# Altium PCB CameraBoard.PcbDoc (part 1 of 2)
Units mm, origin at the board's own origin, x right, y up, seen from the top; angles counter-clockwise.
Board outline 100 x 85.93 mm, 4 copper layers (Top Layer, GND Layer, PWR Layer, Bottom Layer), stack 1.586 mm thick; 79 components, 56 nets, 412 pads, 150 vias.
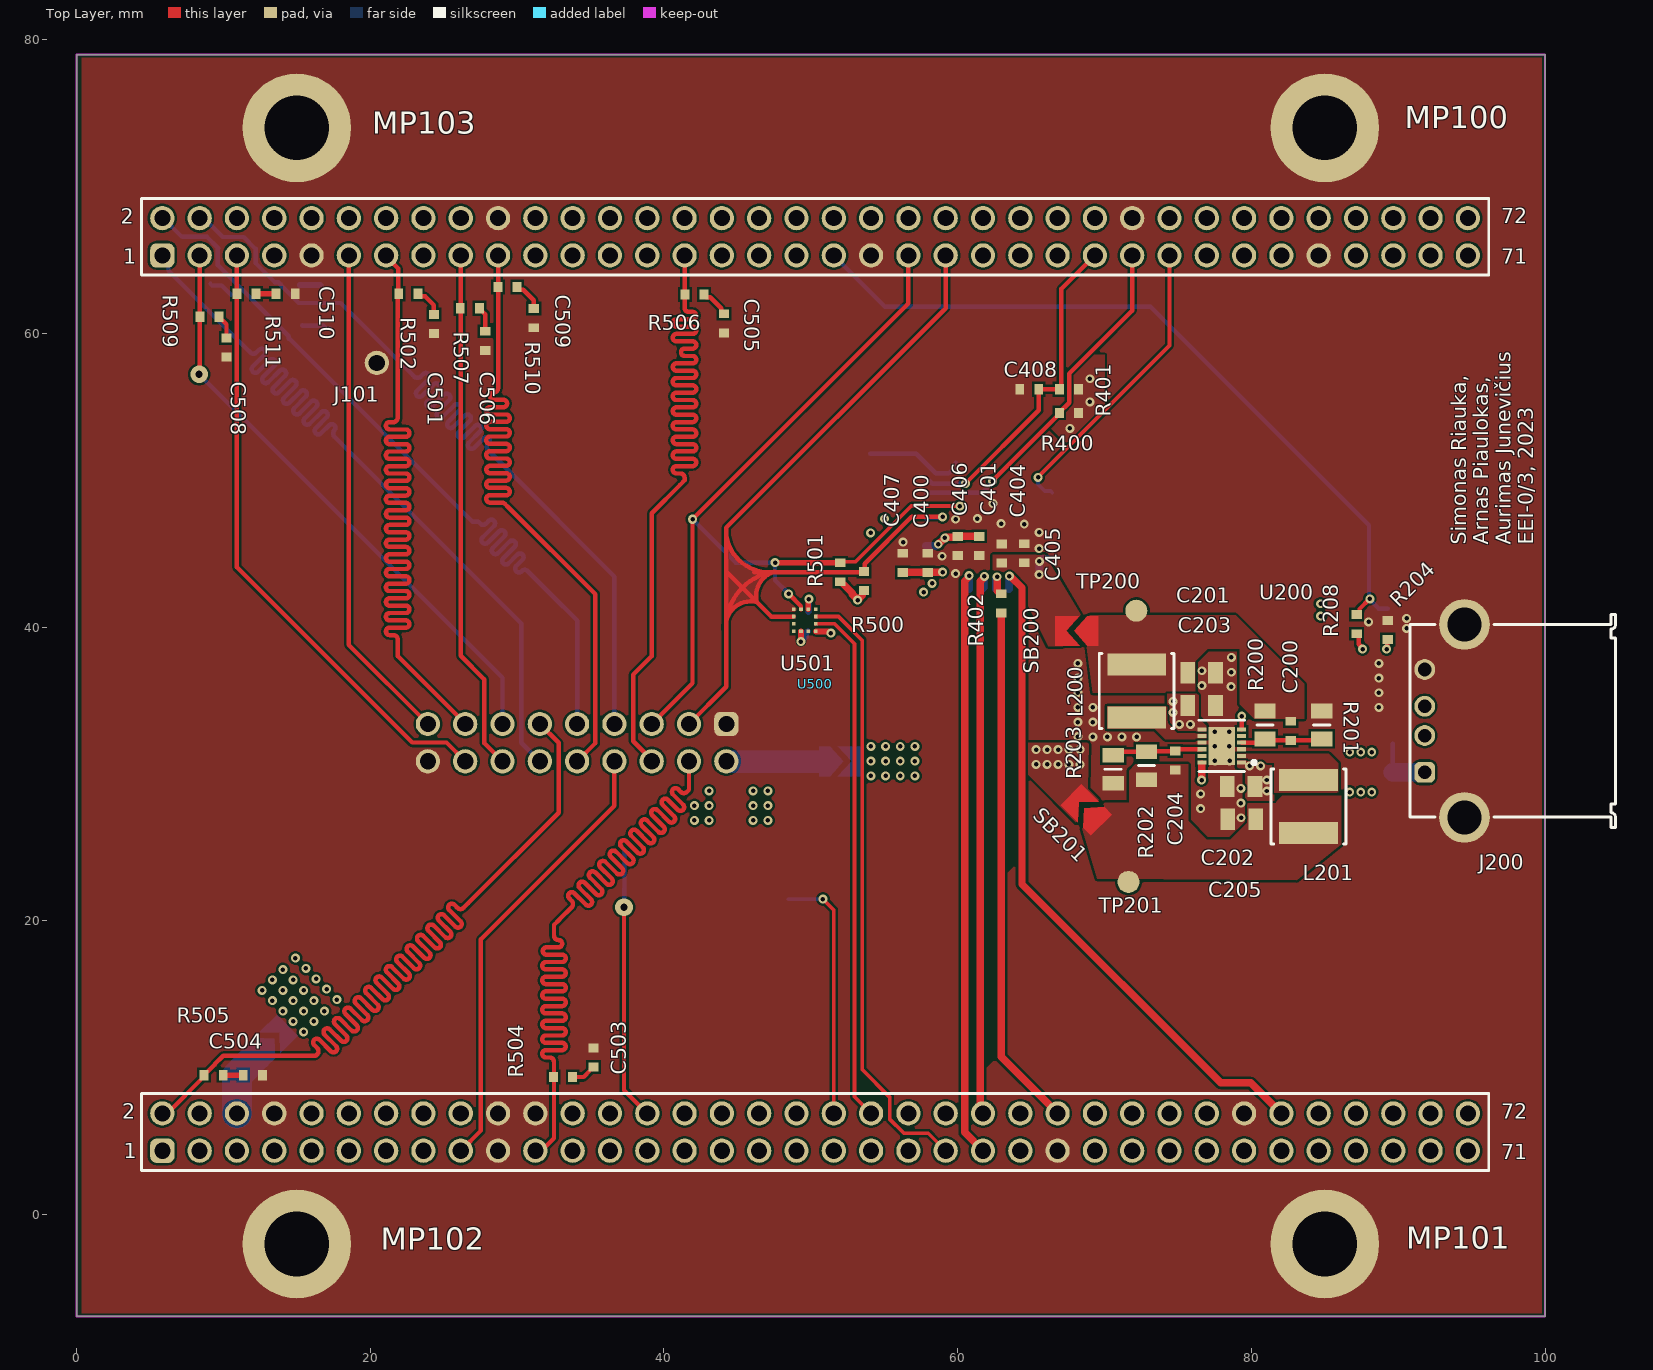
[diagram p0: Top Layer view]
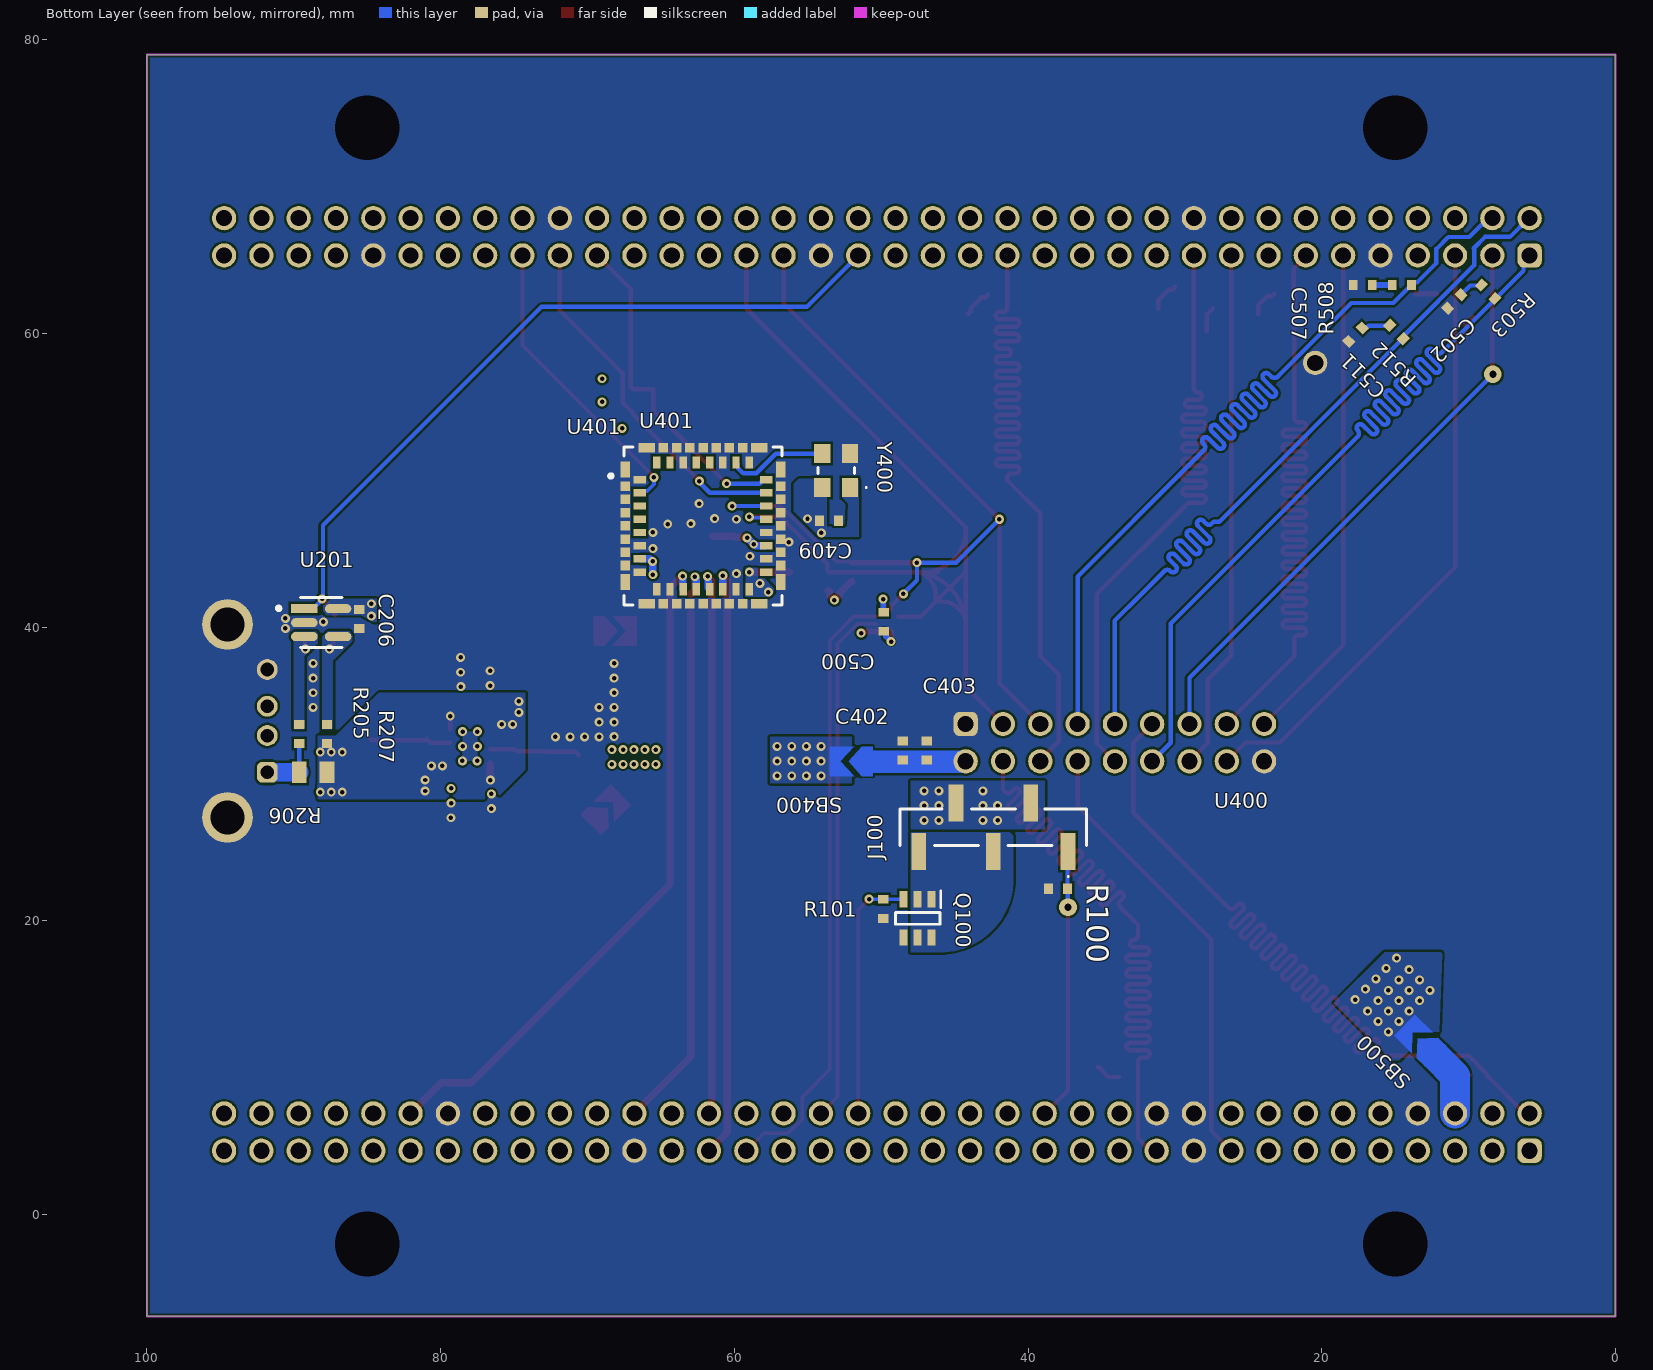
[diagram p1: Bottom Layer view, seen from below]
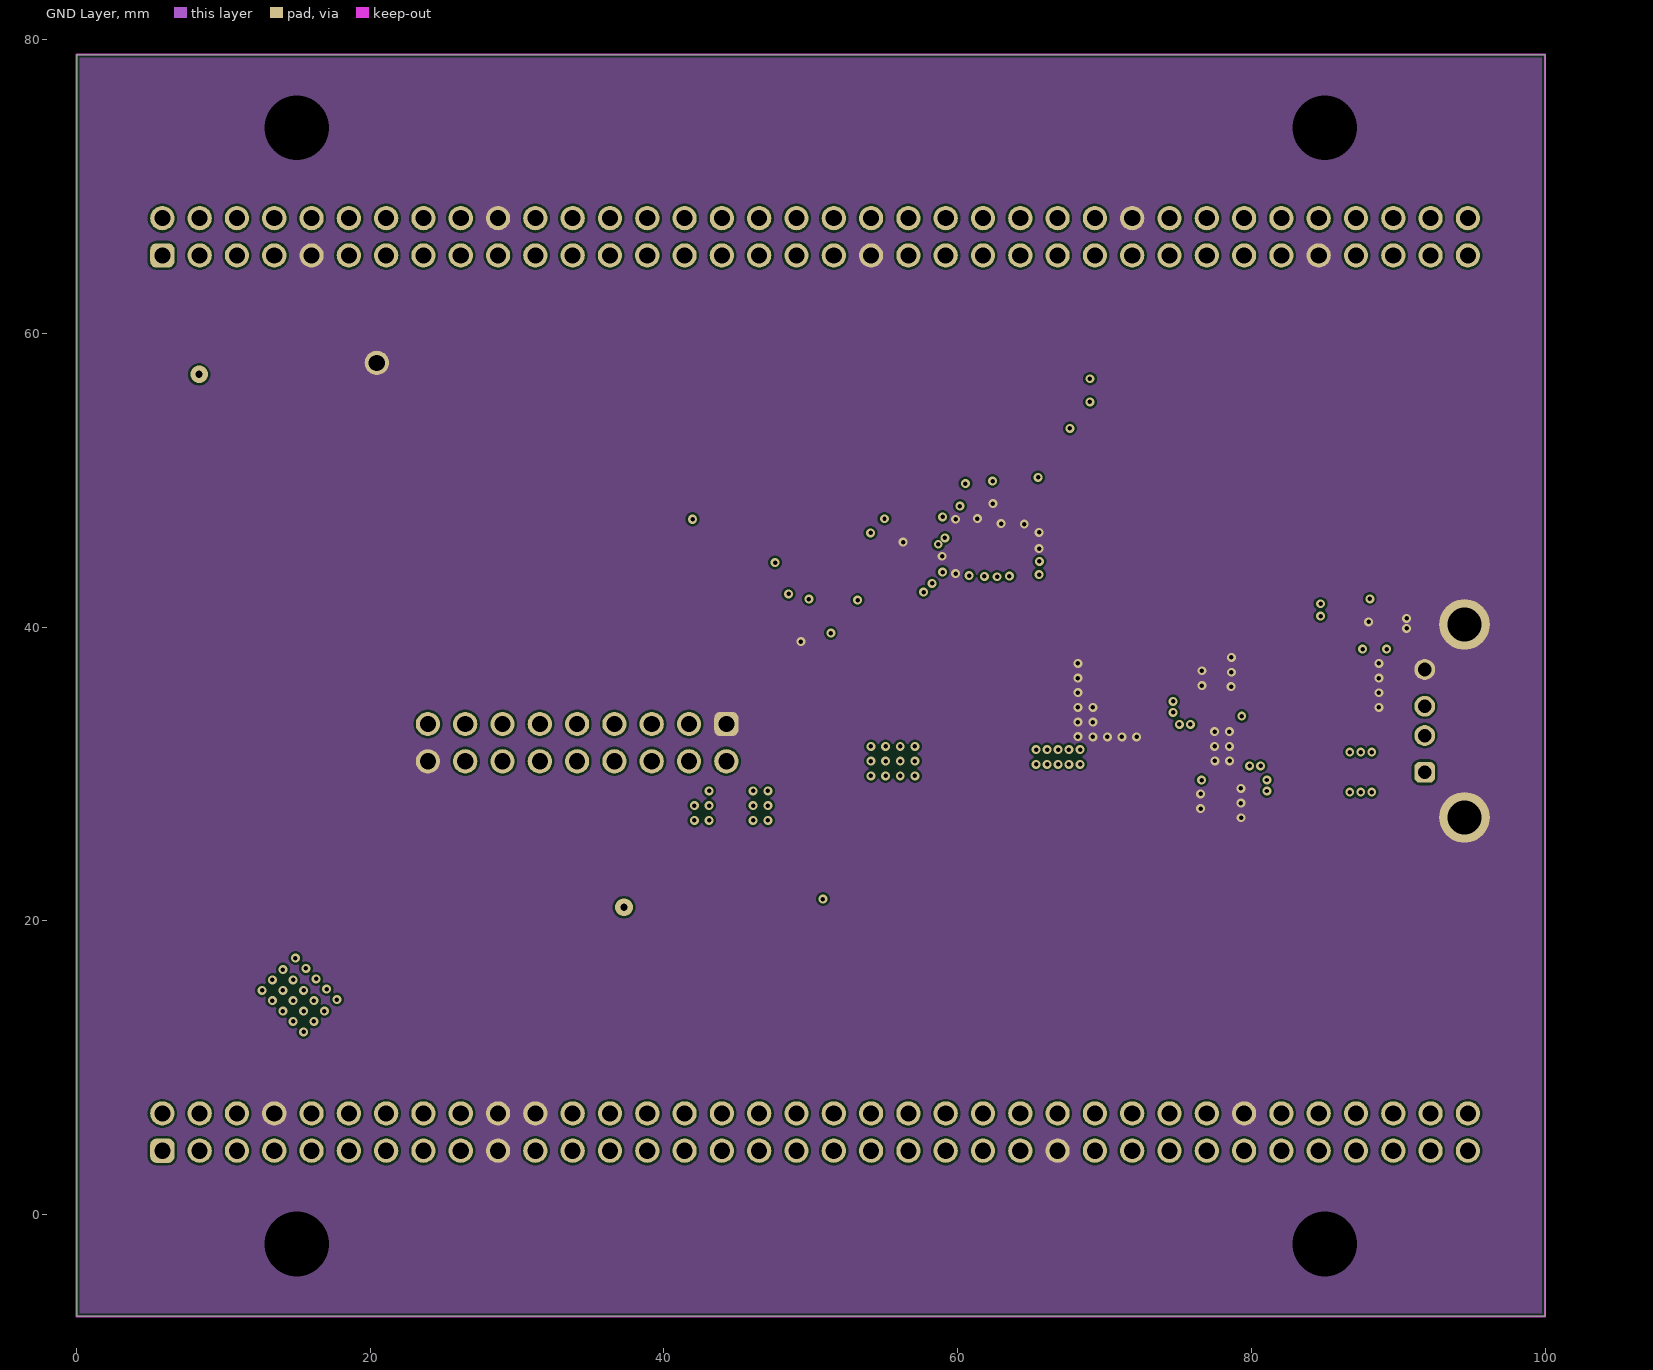
[diagram p2: GND Layer]
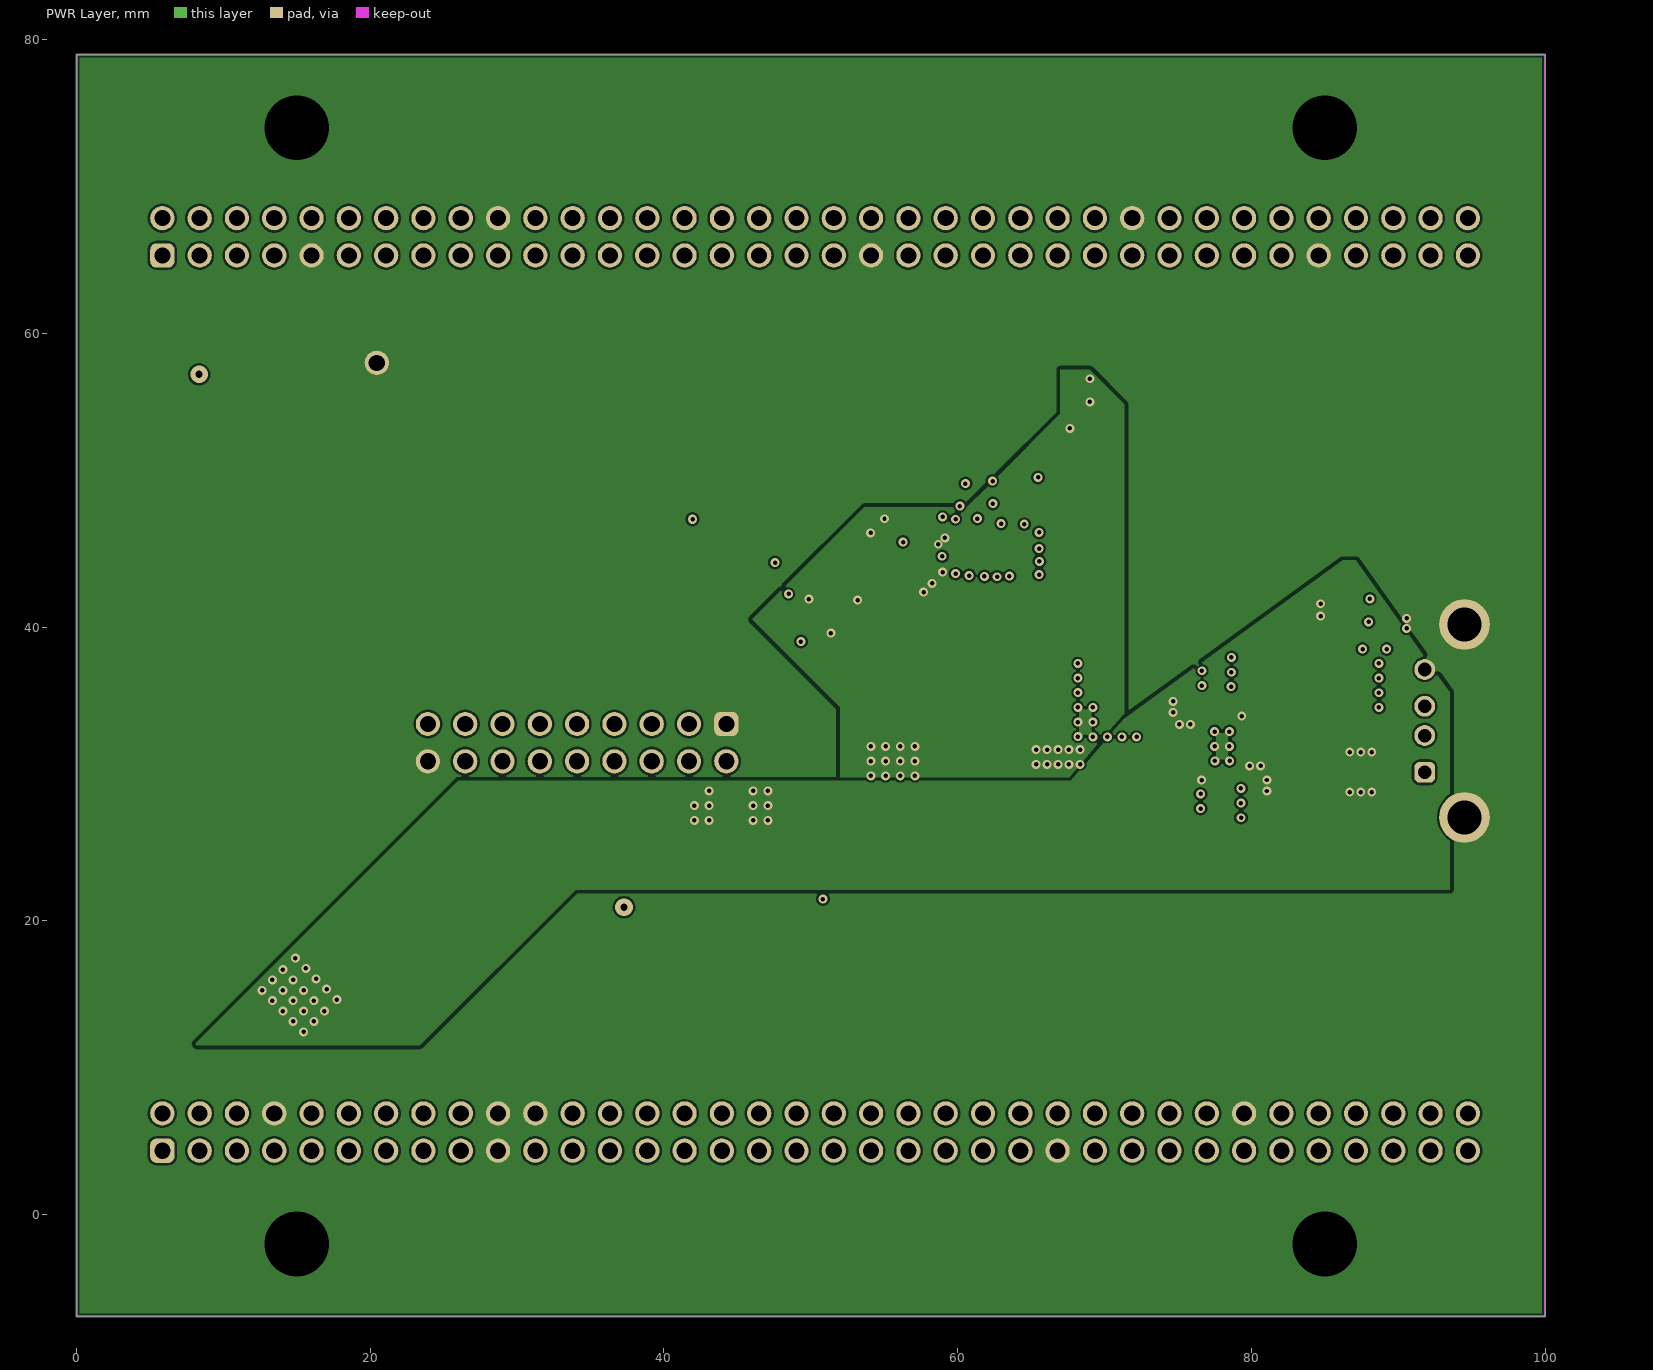
[diagram p3: PWR Layer]

## Layer stack, top to bottom
Top Solder: solder mask 0.0127, Solder Resist, Dk 3.3
Top Layer: signal copper 0.035
Dielectric 1: prepreg 0.2104, PP-006, Dk 4.4
GND Layer: signal copper 0.0152
Dielectric1: core 1.065, FR-4, Dk 4.4
PWR Layer: signal copper 0.0152
Dielectric 2: prepreg 0.2104, PP-006, Dk 4.4
Bottom Layer: signal copper 0.035
Bottom Solder: solder mask 0.0127, Solder Resist, Dk 3.3

## Board outline
0,-6.934 100,-6.934 100,78.994 0,78.994

## Design rules (kind name [scope] priority, off if disabled: settings)
Clearance [OnLayer('PWR Layer') vs OnLayer('PWR Layer')] p1: gap=0.254 ignorepadtopadclearanceinfootprint=FALSE
Clearance Clearance_2 [All] p2: gap=0.152 ignorepadtopadclearanceinfootprint=FALSE
DiffPairsRouting [All] p1: maxlimit=0.254 minlimit=0.254 mostfreqgap=0.254 toplayer_minwidth=0.254 toplayer_maxwidth=0.254 toplayer_prefwidth=0.254 midlayer1_minwidth=0.254 midlayer1_maxwidth=0.254 midlayer1_prefwidth=0.254 midlayer2_minwidth=0.254 midlayer2_maxwidth=0.254 midlayer2_prefwidth=0.254 bottomlayer_minwidth=0.254 bottomlayer_maxwidth=0.254 bottomlayer_prefwidth=0.254 maxuncoupledlength=12.7
HoleSize [All] p1: absolutevalues=TRUE maxlimit=10 minlimit=0.3 maxpercent=80.000 minpercent=20.000
HoleToHoleClearance [All] p1: gap=0.254 allowstackedmicrovias=FALSE
MinimumAnnularRing [All] p1: minimumring=0.152
MinimumSolderMaskSliver [All] p1: minsoldermaskwidth=0.152
PasteMaskExpansion [All] p1: expansion=0.254
PlaneClearance [All] p1: clearance=0.381
PlaneConnect [All] p1: pad.planeconnectstyle=Relief pad.reliefexpansion=0.508 pad.reliefentries=4 pad.reliefconductorwidth=0.254 pad.reliefairgap=0.254 via.planeconnectstyle=Direct via.reliefexpansion=0.508 via.reliefentries=4 via.reliefconductorwidth=0.254 via.reliefairgap=0.254
PolygonConnect [All] p1: connectstyle=Direct reliefconductorwidth=0.254 reliefentries=4 polygonreliefangle="90 Angle" airgapwidth=0.254
RoutingVias [All] p1: holewidth=0.3 width=0.604 viastyle="Through Hole" minholewidth=0.3 minwidth=0.604 maxholewidth=100 maxwidth=1.27
SMDNeckDown [All] p1 off: percent=100.000
SilkToSolderMaskClearance SilkscreenOverComponentPads [IsPad] p1: minsilkscreentomaskgap=0.15 clearancetoexposedcopper=TRUE
SolderMaskExpansion [All] p1: expansion=0.254 istentingtop=FALSE
Width Width_1 [All] p1: maxlimit=10 minlimit=0.254 preferedwidth=0.254
22 further rules are at their usual default settings.

## Classes and differential pairs
component class U_Connectors: J100 J101 MP100 MP101 MP102 MP103 Q100 R100 R101
component class U_Power: C1 C2 C3 C4 C5 C6 C7 C8 C9 C200 C201 C202 C203 C204 C205 C206 J200 L1 L200 L201 R1 R3 R4 R5 R6 R200 R201 R202 R203 R204 R205 R206 R207 R208 SB200 SB201 TP200 TP201 U1 U200 U201
component class U_Computation: C500 C501 C502 C503 C504 C505 C506 C507 C508 C509 C510 C511 R500 R501 R502 R503 R504 R505 R506 R507 R508 R509 R510 R511 R512 SB500 U500 U501
component class U_Cameras: C400 C401 C402 C403 C404 C405 C406 C407 C408 C409 R400 R401 R402 SB400 U400 U401 Y400

## Components (designator, comment, footprint, x,y, rotation, side; value= is the part's Value field where it differs from the comment)
C200 "100pF" 0402_footprint 82.683,32.29 r90 top
C201 "10uF" 0805_FOOTPRINT 76.606,36.906 r180 top
C202 "10uF" 0805_FOOTPRINT 79.299,29.159 r0 top
C203 "10uF" 0805_FOOTPRINT 76.606,34.671 r180 top
C204 "100pF" 0402_footprint 74.817,31.574 r270 top
C205 "10uF" 0805_FOOTPRINT 79.34,26.924 r0 top
C206 "0.1uF" 0402_footprint 85.547,41.213 r270 bottom
C400 "50nF" 0402_FOOTPRINT 57.964,43.733 r90 top
C401 "50nF" 0402_footprint 61.474,46.186 r270 top
C402 "1uF" 0402_footprint 48.534,32.254 r270 bottom
C403 "1uF" 0402_footprint 46.906,32.254 r270 bottom
C404 "50nF" 0402_footprint 63.01,45.663 r270 top
C405 "50nF" 0402_FOOTPRINT 64.531,45.688 r270 top
C406 "50nF" 0402_FOOTPRINT 60.011,46.186 r270 top
C407 "50nF" 0402_footprint 56.266,43.733 r90 top
C408 "1uF" 0402_FOOTPRINT 64.224,56.202 r0 top
C409 "100nF" 0402_FOOTPRINT 52.91,47.256 r0 bottom
C500 "0.1uF" 0402_FOOTPRINT 49.834,41.024 r270 bottom
C501 "0.1uF" 0402_footprint 24.333,61.29 r270 top
C502 "0.1uF" 0402_footprint 10.516,62.636 r315 bottom
C503 "0.1uF" 0402_footprint 35.204,10.054 r90 top
C504 "0.1uF" 0402_footprint 11.354,9.5 r0 top
C505 "0.1uF" 0402_footprint 44.094,61.341 r270 top
C506 "0.1uF" 0402_footprint 27.838,60.152 r270 top
C507 "0.1uF" 0402_footprint 16.561,63.3 r0 bottom
C508 "0.1uF" 0402_footprint 10.211,59.69 r270 top
C509 "0.1uF" 0402_footprint 31.14,61.697 r270 top
C510 "0.1uF" 0402_footprint 13.589,62.7 r0 top
C511 "0.1uF" 0402_footprint 17.247,60.376 r315 bottom
J100 "M20-8770546" M208770546 42.36,26.378 r0 bottom locked
J101 "Header_2.54_1x1" HEADER_2.54_1x1 20.447,58.001 r90 top
J200 "61400416021" 61400416021 97.79,33.619 r90 top
L200 "10uH" FP-NR5040-H_4_1-MFG 72.19,35.665 r90 top
L201 "10uH" FP-NR5040-H_4_1-MFG 83.896,27.788 r270 top
MP100 "9774020360R" 9774020360 85,74 r0 top
MP101 "9774020360R" 9774020360 85,-2 r0 top
MP102 "9774020360R" 9774020360 15,-2 r0 top
MP103 "9774020360R" 9774020360 15,74 r0 top
Q100 "SI3460DDV-T1-BE3" SOT95P284X110-6N 47.517,20.174 r270 bottom
R100 "25kOhm" 0402_footprint 38.609,22.195 r180 bottom
R101 "0402" 0402_FOOTPRINT 49.866,20.174 r90 bottom
R200 "100k" 0805 80.925,33.343 r90 top
R201 "100k" 0805 84.793,33.343 r90 top
R202 "437k" 0805 72.854,30.569 r90 top
R203 "120k" 0805 70.587,30.328 r90 top
R204 "4.7kOhm" 0402_footprint 89.285,40.464 r270 top
R205 "4.7kOhm" 0402_footprint 89.632,33.376 r270 bottom
R206 "0.01Ohm" 0805_FOOTPRINT 88.682,30.119 r0 bottom
R207 "4.7kOhm" 0402_footprint 87.732,33.376 r270 bottom
R208 "4.7kOhm" 0402_footprint 87.165,40.856 r270 top
R400 "100k" 0402_FOOTPRINT 66.937,54.59 r0 top
R401 "10k" 0402_FOOTPRINT 66.937,56.202 r0 top
R402 "22.1" 0402_FOOTPRINT 62.964,40.973 r90 top
R500 "4.7kOhm" 0402_FOOTPRINT 53.618,43.789 r270 top
R501 "4.7kOhm" 0402_FOOTPRINT 52.007,44.388 r270 top
R502 "4.7kOhm" 0402_footprint 23.241,62.713 r180 top
R503 "4.7kOhm" 0402_footprint 9.123,63.302 r225 bottom
R504 "4.7kOhm" 0402_footprint 32.482,9.373 r0 top
R505 "4.7kOhm" 0402_footprint 8.687,9.5 r0 top
R506 "4.7kOhm" 0402_footprint 42.727,62.662 r180 top
R507 "4.7kOhm" 0402_footprint 27.432,61.722 r180 top
R508 "4.7kOhm" 0402_footprint 13.894,63.3 r0 bottom
R509 "4.7kOhm" 0402_footprint 8.407,61.138 r0 top
R510 "4.7kOhm" 0402_footprint 30.002,63.17 r180 top
R511 "4.7kOhm" 0402_footprint 12.222,62.7 r180 top
R512 "4.7kOhm" 0402_footprint 14.453,59.639 r45 bottom
SB200 "Solder_bridge" SOLDER_BRIDGE 68.656,39.751 r180 top
SB201 "Solder_bridge" SOLDER_BRIDGE 69.132,27.176 r135 top
SB400 "Solder_bridge" SOLDER_BRIDGE 51.501,30.867 r0 bottom
SB500 "Solder_bridge" SOLDER_BRIDGE 12.94,11.477 r45 bottom
TP200 "Test_point" TEST_POINT 72.161,41.123 r90 top
TP201 "Test_point" TEST_POINT 71.63,22.655 r90 top
U200 "PAM2306DYPAA" DCDC 79.328,30.787 r180 top
U201 "TLV9151IDBVR" FP-DBV0005A-IPC_A 88.128,40.31 r180 bottom
U400 "OV2640_Breakout" OV2640_BREAKOUT 44.247,30.907 r90 bottom locked
U401 "Flir_Lepton_connector_1001" 105028-1001 62.151,46.901 r180 bottom locked
U500 "NUCLEO-H755ZI" H7/H5_NUCLEO_SHIELD 5.842,4.393 r90 top locked
U501 "MC64700" MC6470 49.584,40.474 r270 top
Y400 "ECS-3225MVQ-250-CN-TR" ECS3225MVQ250CNTR 53.066,50.664 r90 bottom

## Footprints (in the part's own frame and the unit in brackets; to place one, negate y for a bottom-side part, rotate by r counter-clockwise, add the part's x,y. Pads: shape width x height; smd on the part's side, far side on the other; paste and mask are expansions set on the pad)
0402_footprint [mm]
  rect 0.6x0.7 smd: 1(0,0) 2(1.3,0)
0402_FOOTPRINT [mm]
  rect 0.6x0.7 smd: 1(0,0) 2(1.3,0)
0805 [mm]
  rect 1x1.45 smd: 1(-0.95,0) 2(0.95,0)
  silkscreen extent 0,-0.55 0,0.55, body extent -1,-0.63 1,0.63, height 0.7
0805_FOOTPRINT [mm]
  rect 1x1.45 smd: 1(-0.95,0) 2(0.95,0)
105028-1001 [mm] "FLIR camera connector form molex"
  rect 0.84x0.5 smd paste+0 mask+0: 1(-4.29,3.15) 2(-4.29,2.25) 3(-4.29,1.35) 4(-4.29,0.45) 5(-4.29,-0.45) 6(-4.29,-1.35) 7(-4.29,-2.25) 8(-4.29,-3.15) 17(4.33,-3.15) 18(4.33,-2.25) 19(4.33,-1.35) 20(4.33,-0.45) 21(4.33,0.45) 22(4.33,1.35) 23(4.33,2.25) 24(4.33,3.15)
  rect 0.5x0.84 smd paste+0 mask+0: 9(-3.13,-4.31) 10(-2.23,-4.31) 11(-1.33,-4.31) 12(-0.43,-4.31) 13(0.47,-4.31) 14(1.37,-4.31) 15(2.27,-4.31) 16(3.17,-4.31) 25(3.17,4.31) 26(2.27,4.31) 27(1.37,4.31) 28(0.47,4.31) 29(-0.43,4.31) 30(-1.33,4.31) 31(-2.23,4.31) 32(-3.13,4.31)
  rect 1.1x0.65 smd paste+0 mask+0: 33(-3.81,5.305) 41(3.85,5.305) 60(-3.81,-5.305) 68(3.85,-5.305)
  rect 0.65x0.65 smd paste+0 mask+0: 34(-2.68,5.305) 35(-1.78,5.305) 36(-0.88,5.305) 37(0.02,5.305) 38(0.92,5.305) 39(1.82,5.305) 40(2.72,5.305) 44(-5.285,2.7) 45(5.325,2.7) 46(-5.285,1.8) 47(5.325,1.8) 48(-5.285,0.9) 49(5.325,0.9) 50(-5.285,0) 51(5.325,0) 52(-5.285,-0.9) 53(5.325,-0.9) 54(-5.285,-1.8) 55(5.325,-1.8) 56(-5.285,-2.7) 57(5.325,-2.7) 61(-2.68,-5.305) 62(-1.78,-5.305) 63(-0.88,-5.305) 64(0.02,-5.305) 65(0.92,-5.305) 66(1.82,-5.305) 67(2.72,-5.305)
  rect 0.65x1.1 smd paste+0 mask+0: 42(-5.285,3.83) 43(5.325,3.83) 58(-5.285,-3.83) 59(5.325,-3.83)
  silkscreen extent -6.38,-5.38 5.4,5.37, body extent -5.46,-5.3 5.32,5.3, height 4.35
9774020360 [mm] "M3 Thread Internal, Length 2mm"
  round 7.4 / inner round 0 / far side round 0 hole 4.4 unplated: 1(0,0)
  body extent -3,-3 3,3, height 2
61400416021 [mm] "USB 2.0 Type A Horizontal"
  rrect50% 1.42x1.42 hole 0.92: 1(-3.5,5.99)
  round 1.42 hole 0.92: 2(-1,5.99) 3(1,5.99) 4(3.5,5.99)
  round 3.45 hole 2.3: Shell(-6.57,3.28) Shell(6.57,3.28)
  silkscreen extent -7.25,-7 7.25,7, body extent -8,-7 8,7, height 7.63
DCDC [mm]
  rect 0.6x0.28 smd paste+0 mask+0: 1(0,0) 2(0,-0.45) 3(0,-0.9) 4(0,-1.35) 5(0,-1.8) 6(0,-2.25) 7(2.7,-2.25) 8(2.7,-1.8) 9(2.7,-1.35) 10(2.7,-0.9) 11(2.7,-0.45) 12(2.7,0)
  rect 1.79x2.6 smd paste+0 mask+0: 13(1.35,-1.125)
  silkscreen extent -0.98,-2.87 2.9,0.63, body extent -0.4,-2.77 3.1,0.53, height 0.25
ECS3225MVQ250CNTR [mm]
  rect 1.3x1.1 smd: 1(-1.15,-0.95) 2(1.15,-0.95) 3(1.15,0.95) 4(-1.15,0.95)
  silkscreen extent -1.2,-2.1 0.2,1.25, body extent -1.69,-1.39 1.69,1.39, height 1.3
FP-DBV0005A-IPC_A [mm]
  rect 1.805x0.612 smd paste+0 mask+0: 1(-1.15,0.95)
  rrect100% 1.805x0.612 smd paste+0 mask+0: 2(-1.15,0) 3(-1.15,-0.95) 4(1.15,-0.95) 5(1.15,0.95)
  silkscreen extent -3.03,-1.7 1.4,1.7, body extent -1.4,-1.45 1.4,1.45, height 1.45
FP-NR5040-H_4_1-MFG [mm]
  rect 1.5x4 smd paste+0 mask+0: 1(-1.8,0) 2(1.8,0)
  silkscreen extent -2.55,-2.55 2.55,2.55, body extent -2.65,-2.65 2.65,2.65, height 0.25
H7/H5_NUCLEO_SHIELD [mm]
  rrect50% 1.65x1.65 hole 1.1: 1(-0.04,0) 73(60.921,0)
  round 1.65 hole 1.1: 2(2.5,0) 3(-0.04,-2.54) 4(2.5,-2.54) 5(-0.04,-5.08) 6(2.5,-5.08) 7(-0.04,-7.62) 8(2.5,-7.62) 9(-0.04,-10.16) 10(2.5,-10.16) 11(-0.04,-12.7) 12(2.5,-12.7) 13(-0.04,-15.24) 14(2.5,-15.24) 15(-0.04,-17.78) 16(2.5,-17.78) 17(-0.04,-20.32) 18(2.5,-20.32) 19(-0.04,-22.86) 20(2.5,-22.86) 21(-0.04,-25.4) 22(2.5,-25.4) 23(-0.04,-27.94) 24(2.5,-27.94) 25(-0.04,-30.48) 26(2.5,-30.48) 27(-0.04,-33.02) 28(2.5,-33.02) 29(-0.04,-35.56) 30(2.5,-35.56) 31(-0.04,-38.1) 32(2.5,-38.1) 33(-0.04,-40.64) 34(2.5,-40.64) 35(-0.04,-43.18) 36(2.5,-43.18) 37(-0.04,-45.72) 38(2.5,-45.72) 39(-0.04,-48.26) 40(2.5,-48.26) 41(-0.04,-50.8) 42(2.5,-50.8) 43(-0.04,-53.34) 44(2.5,-53.34) 45(-0.04,-55.88) 46(2.5,-55.88) 47(-0.04,-58.42) 48(2.5,-58.42) 49(-0.04,-60.96) 50(2.5,-60.96) 51(-0.04,-63.5) 52(2.5,-63.5) 53(-0.04,-66.04) 54(2.5,-66.04) 55(-0.04,-68.58) 56(2.5,-68.58) 57(-0.04,-71.12) 58(2.5,-71.12) 59(-0.04,-73.66) 60(2.5,-73.66) 61(-0.04,-76.2) 62(2.5,-76.2) 63(-0.04,-78.74) 64(2.5,-78.74) 65(-0.04,-81.28) 66(2.5,-81.28) 67(-0.04,-83.82) 68(2.5,-83.82) 69(-0.04,-86.36) 70(2.5,-86.36) 71(-0.04,-88.9) 72(2.5,-88.9) 74(63.46,0) 75(60.921,-2.54) 76(63.46,-2.54) 77(60.92,-5.08) 78(63.46,-5.08) 79(60.92,-7.62) 80(63.46,-7.62) 81(60.92,-10.16) 82(63.46,-10.16) 83(60.92,-12.7) 84(63.46,-12.7) 85(60.92,-15.24) 86(63.46,-15.24) 87(60.92,-17.78) 88(63.46,-17.78) 89(60.92,-20.32) 90(63.46,-20.32) 91(60.92,-22.86) 92(63.46,-22.86) 93(60.92,-25.4) 94(63.46,-25.4) 95(60.92,-27.94) 96(63.46,-27.94) 97(60.92,-30.48) 98(63.46,-30.48) 99(60.92,-33.02) 100(63.46,-33.02) 101(60.92,-35.56) 102(63.46,-35.56) 103(60.92,-38.1) 104(63.46,-38.1) 105(60.92,-40.64) 106(63.46,-40.64) 107(60.92,-43.18) 108(63.46,-43.18) 109(60.92,-45.72) 110(63.46,-45.72) 111(60.92,-48.26) 112(63.46,-48.26) 113(60.92,-50.8) 114(63.46,-50.8) 115(60.92,-53.34) 116(63.46,-53.34) 117(60.92,-55.88) 118(63.46,-55.88) 119(60.92,-58.42) 120(63.46,-58.42) 121(60.92,-60.96) 122(63.46,-60.96) 123(60.92,-63.5) 124(63.46,-63.5) 125(60.92,-66.04) 126(63.46,-66.04) 127(60.92,-68.58) 128(63.46,-68.58) 129(60.92,-71.12) 130(63.46,-71.12) 131(60.92,-73.66) 132(63.46,-73.66) 133(60.92,-76.2) 134(63.46,-76.2) 135(60.92,-78.74) 136(63.46,-78.74) 137(60.92,-81.28) 138(63.46,-81.28) 139(60.92,-83.82) 140(63.46,-83.82) 141(60.92,-86.36) 142(63.46,-86.36) 143(60.92,-88.9) 144(63.46,-88.9)
  silkscreen extent -1.39,-90.32 64.81,1.42, body extent -1.31,-90.17 64.73,1.27, height 8.59
HEADER_2.54_1x1 [mm]
  round 1.65 hole 1.1: 0(0,0)
M208770546 [mm]
  rect 1x2.51 smd: 1(-5.08,1.655) 2(-2.54,-1.655) 3(0,1.655) 4(2.54,-1.655) 5(5.08,1.655)
  silkscreen extent -6.35,-1.25 6.35,3.4, body extent -6.35,-2.56 6.35,2.52, height 9.66
MC6470 [mm] "https://www.mouser.lt/datasheet/2/821/MC6470_Datasheet_APS_048_0033v1_7_1-3003085.pdf"
  rect 0.25x0.25 smd: 1(-0.75,-0.75) 2(-0.75,-0.25) 3(-0.75,0.25) 4(-0.75,0.75) 5(-0.25,0.75) 6(0.25,0.75) 7(0.75,0.75) 8(0.75,0.25) 9(0.75,-0.25) 10(0.75,-0.75) 11(0.25,-0.75) 12(-0.25,-0.75)
  body extent -0.95,-1.05 0.95,1.05, height 0.95
OV2640_BREAKOUT [mm] "Breakout board for camera sensor"
  rrect50% 1.65x1.65 hole 1.1: 1(2.5,0)
  round 1.65 hole 1.1: 2(-0.04,0) 3(2.5,-2.54) 4(-0.04,-2.54) 5(2.5,-5.08) 6(-0.04,-5.08) 7(2.5,-7.62) 8(-0.04,-7.62) 9(2.5,-10.16) 10(-0.04,-10.16) 11(2.5,-12.7) 12(-0.04,-12.7) 13(2.5,-15.24) 14(-0.04,-15.24) 15(2.5,-17.78) 16(-0.04,-17.78) 17(2.5,-20.32) 18(-0.04,-20.32)
SOLDER_BRIDGE [mil]
  round 1 smd mask+1.97: 1(-36,1) 2(77,0)
  Top Layer pour cut-out: -7,42.98 -7,-43 11,-43 50.85,0.04 11,42.98
  Top Layer region: 79,39.37 79,-39.42 13,-40 50,0 13,39.37
  Top Layer region: -36,-39.37 -36,39.37 -6.97,39.37 28.46,0 -6.97,-39.37
SOT95P284X110-6N [mm]
  rect 1.1x0.55 smd: 1(-1.3,0.95) 2(-1.3,0) 3(-1.3,-0.95) 4(1.3,-0.95) 5(1.3,0) 6(1.3,0.95)
  silkscreen extent -1.85,-1.51 0.4,1.58, body extent -1.42,-1.51 1.42,1.51, height 1.1
TEST_POINT [mm]
  round 1.5 smd: 1(0,0)

## Part data
C200 C204 C206 C400 C401 C402 C403 C404 C405 C406 C407 C408 C409 C500 C501 C502 C503 C504 C505 C506 C507 C508 C509 C510 C511: library part Capacitor_0402, "0402 capacitor"
  C200 C204: ComponentLink1Description=Buy, ComponentLink1URL=https://www.mouser.lt/ProductDetail/TAIYO-YUDEN/MAASL063SB7101MFCA01?qs=tlsG%2FOw5FFiYJqKsbt67cA%3D%3D
C201 C202 C203 C205: library part Capacitor_0805, ComponentLink1Description=Buy, ComponentLink1URL=https://www.mouser.lt/ProductDetail/963-MSASL21GAB7106KT
J100: "SMD 5 pin connector", Manufacturer_Name=Harwin, Mouser Part Number=855-M20-8770546, ComponentLink1Description=Buy, ComponentLink1URL=https://www.mouser.lt/ProductDetail/Amphenol-FCI/10129380-910002ALF?qs=0lQeLiL1qybuIOWgC6EkxQ%3D%3D, Datasheet Link=https://cdn.harwin.com/pdfs/M20-877.pdf, Height=10.01mm, Manufacturer_Part_Number=M20-8770546, Mouser Price/Stock=https://www.mouser.co.uk/ProductDetail/Harwin/M20-8770546?qs=ulE8k0yEMYbi%252BxzjuY0x2Q%3D%3D
J200: library part CMP-1502-03227-2, Color=White, Contact Resistance=20mΩ, Current Rating=1.5A, Flammability Rating="UL94 V-0", Insulation Resistance=1GΩ, Max Operating Temperature=105°C, Min Operating Temperature=-40°C, Operating Supply Voltage=30V, ComponentLink1Description=Buy, ComponentLink1URL=https://www.mouser.lt/ProductDetail/Amphenol-Commercial-Products/UE27AC5410H?qs=JOekRM69xWp%2FpXBIdMB8qQ%3D%3D, Connector Type=USB, Contact Material=Copper, Contact Plating=Gold, Gender=Receptacle, Insulation Material=PBT, Lead Free="Lead Free", Length=15.8mm, Mount="Horizontal, Through Hole", NexarPartId=21041530, Number of Contacts=4, Number of pins=4, Number of Ports=1, Number of Positions=4, Orientation=Horizontal, REACH SVHC=Unknown, RoHS=Compliant, Termination=Solder, USB Standard="USB 2.0", Voltage Rating=30V, Voltage Rating (DC)=30V, Width=14.4mm
L200 L201: library part CMP-14484-000589-1, "SMD Power Inductors 10uH ±20% 2.1A 72.8mΩ"
  L201: ComponentLink1Description=Buy, ComponentLink1URL=https://www.mouser.lt/ProductDetail/TAIYO-YUDEN/NRS5040T100MMGJ?qs=y6ZabgHbY%252BxiJJH9TpkLFQ%3D%3D&fbclid=IwAR06tw8zc_F3vS_tc6rGp3H4m7RLkaTrMlQiQ_PAa6jySuKYRkC0jCwxpBU
MP100 MP101 MP102 MP103: library part CMP-208001-000010-2, "SMT STEEL SPACER, M3 INTERNAL NO", Max Operating Temperature=150°C, Min Operating Temperature=-55°C, Height=3.5mm, Length=2mm, Material=Steel, NexarPartId=75603355, Packaging="Tape and Reel", RoHS=Compliant, Width=6mm
Q100: "MOSFET (N-Channel)", Manufacturer_Name=Vishay, Mouser Part Number=78-SI3460DDV-T1-BE3, ComponentLink1Description=Buy, ComponentLink1URL=https://www.mouser.lt/ProductDetail/Vishay-Siliconix/SI3460DDV-T1-BE3?qs=CiayqK2gdcJwCX50G4xrrA%3D%3D, Datasheet Link=https://www.mouser.com/datasheet/2/427/SI3460DD-1764976.pdf, Height=1.1mm, Manufacturer_Part_Number=SI3460DDV-T1-BE3, Mouser Price/Stock=https://www.mouser.co.uk/ProductDetail/Vishay-Siliconix/SI3460DDV-T1-BE3?qs=CiayqK2gdcJwCX50G4xrrA%3D%3D
R100 R101 R204 R205 R207 R208 R400 R401 R402 R500 R501 R502 R503 R504 R505 R506 R507 R508 R509 R510 R511 R512: library part Resistor_0402, "0402 resistor"
R200: library part R
R201: library part R, "https://www.mouser.lt/ProductDetail/Panasonic/ERA-6VEB1003V?qs=rI7uf1IzohRHGRtRVKRr%2FA%3D%3D"
R202: library part R, "RN73H2ATTD4373B25"
R203: library part R, "ERA-6AEB124V"
R206: library part Resistor_0805
U200: "https://eu.mouser.com/ProductDetail/Diodes-Incorporated/PAM2306DYPAA?qs=%252BSlWJf1dfkJt9LGsP0OSAw%3D%3D&_gl=1*1y46ajh*_ga*MTcxMTg1MDAyNS4xNjk0MzU1NzEw*_ga_15W4STQT4T*MTY5ODI1ODI3MC4xNS4xLjE2OTgyNTgyNzAuNjAuMC4w", ComponentLink1Description=Datasheet, ComponentLink1URL=https://eu.mouser.com/datasheet/2/115/DIOD_S_A0010934527_1-2513103.pdf, ComponentLink2Description=Buy, ComponentLink2URL=https://www.mouser.lt/ProductDetail/Diodes-Incorporated/PAM2306DYPAA?qs=%252BSlWJf1dfkJt9LGsP0OSAw%3D%3D
U201: library part CMP-04895-000336-1, "OPAMP", ComponentLink1Description=Buy, ComponentLink1URL=https://www.mouser.lt/ProductDetail/Texas-Instruments/TLV9151SIDBVR?qs=bAKSY%2FctAC5JlrvQZokK1A%3D%3D, ComponentLink2Description=Datasheet, ComponentLink2URL=https://www.ti.com/lit/ds/symlink/tlv9152.pdf?HQS=dis-mous-null-mousermode-dsf-pf-null-wwe&ts=1699274671183&ref_url=https%253A%252F%252Fwww.ti.com%252Fgeneral%252Fdocs%252Fsuppproductinfo.tsp%253FdistId%253D26%2526gotoUrl%253Dhttps%253A%252F%252Fwww.ti.com%252Flit%252Fgpn%252Ftlv9152
U400: "https://www.uctronics.com/download/cam_module/OV2640DS.pdf", ComponentLink1Description="Breakout link", ComponentLink1URL=https://www.duino.lt/index.php?controller=attachment&id_attachment=447
U500: "https://www.st.com/en/evaluation-tools/nucleo-h755zi-q.html#documentation", ComponentLink1Description="Datasheet board", ComponentLink1URL=https://www.st.com/resource/en/user_manual/um2408-stm32h7-nucleo144-boards-mb1363-stmicroelectronics.pdf, ComponentLink2Description=Datasheet, ComponentLink2URL=https://www.google.com/url?sa=t&rct=j&q=&esrc=s&source=web&cd=&cad=rja&uact=8&ved=2ahUKEwiL2Oj0qt6BAxVAgv0HHcIABWcQFnoECAkQAQ&url=https%3A%2F%2Fwww.st.com%2Fresource%2Fen%2Fdatasheet%2Fstm32h755bi.pdf&usg=AOvVaw10mo3FsD-TXgt8LL4QIrqK&opi=89978449
U501: "6 axis accelerometer + magnetometer", ComponentLink1Description=Datasheet, ComponentLink1URL=https://www.mouser.lt/datasheet/2/821/MC6470_Datasheet_APS_048_0033v1_7_1-3003085.pdf
Y400: "25MHz oscilattor", Manufacturer_Name=ECS, Mouser Part Number=520-3225MVQ-250-CN-T, Arrow Part Number=ECS-3225MVQ-250-CN-TR, Arrow Price/Stock=https://www.arrow.com/en/products/ecs-3225mvq-250-cn-tr/ecs-international?region=nac, ComponentLink1Description=Buy, ComponentLink1URL=https://www.mouser.lt/ProductDetail/ECS/ECS-3225MVQ-250-CN-TR?qs=GedFDFLaBXEiQ79b6FnYAg%3D%3D, Datasheet Link=https://www.mouser.com/datasheet/2/122/ECS-3225MVQ-1825332.pdf, Height=1.2mm, Manufacturer_Part_Number=ECS-3225MVQ-250-CN-TR, Mouser Price/Stock=https://www.mouser.co.uk/ProductDetail/ECS/ECS-3225MVQ-250-CN-TR?qs=GedFDFLaBXEiQ79b6FnYAg%3D%3D
U401: ComponentLink1Description=Datasheet, ComponentLink1URL=https://cdn.sparkfun.com/assets/f/6/3/4/c/Lepton_Engineering_Datasheet_Rev200.pdf, ComponentLink2Description=Buy, ComponentLink2URL=https://www.mouser.lt/ProductDetail/883-500-0771-01, ComponentLink3Description=Buy, ComponentLink3URL=https://www.mouser.lt/ProductDetail/Molex/105028-1001?qs=3OKVfsn1b5DSpyA99lGNjg%3D%3D

## Via types
v1: diameter 0.61, hole 0.305, Top Layer to Bottom Layer, tented both sides, 147 vias
v2: diameter 1.2, hole 0.5, Top Layer to Bottom Layer, tented both sides, 2 vias
v3: diameter 0.635, hole 0.305, Top Layer to Bottom Layer, tented both sides, 1 vias

## Nets (pads, with @x,y where several pads share a name; then routed paths per layer and width w, separated by ;. In a path a pad name is that pad's centre, name@x,y a point inside that pad or via, vN(x,y) a via of type N, cw(c..) or ccw(c..) an arc to the next point about the centre after c; other vN are vias at no path point)
1V2: C404.2 C405.2 SB200.2 U401.7 | length 1.9
  Bottom Layer w0.508: v1(65.545,43.577) 65.551,43.583 65.551,44.479 v1(65.558,44.485) 65.585,44.485 65.747,44.646 66.437,44.646 U401.7@66.441,44.65
2V8: C400.1 C401.1 C406.1 C407.1 C409.2 C500.1 R400.2 R401.2 R500.2 R501.2 SB201.2 SB400.2 U401.16 U401.19 U501.3 U501.7 Y400.1 Y400.4 | length 12.6
  Top Layer w0.381: U501.3@49.834,41.224 49.834,41.882 v1(49.866,41.914)
  Top Layer w0.4: U501.7@50.34,39.718 51.183,39.718 51.302,39.599 v1(51.359,39.599)
  Top Layer w0.5: R501.2@52.007,43.088 52.057,43.088 52.814,42.331 52.814,42.244 53.19,41.868 v1(53.19,41.838) 53.518,42.167 53.518,42.439 53.568,42.439 R500.2@53.618,42.489
  Top Layer w0.508: C407.1@56.266,43.733 C400.1@57.964,43.733 57.972,43.742 58.965,43.742 v1(58.973,43.75) ; v1(58.676,45.649) 58.683,45.649 59.102,46.068 59.102,46.087 59.156,46.087 59.209,46.14 59.965,46.14 C406.1@60.011,46.186 C401.1@61.474,46.186
  Bottom Layer w0.381: C500.1@49.834,41.024 49.85,41.04 49.85,41.898 v1(49.866,41.914)
  Bottom Layer w0.508: U401.19@57.821,45.55 57.825,45.554 58.554,45.554 58.648,45.649 58.683,45.649 59.121,46.087 v1(59.128,46.087)
  other v1: 54.088,29.879 55.088,29.879 56.088,29.879 57.088,29.879 65.339,30.666 66.089,30.666 66.839,30.666 67.57,30.666 68.339,30.666 54.088,30.879 55.088,30.879 56.088,30.879 57.088,30.879 65.339,31.666 66.089,31.666 66.839,31.666 67.57,31.666 68.339,31.666 54.088,31.879 55.088,31.879 56.088,31.879 57.088,31.879 57.683,42.393 58.254,42.985 54.073,46.42 55.016,47.384 67.634,53.537 69,55.337 69.003,56.918
5V: C202.2 C203.2 C206.1 J100.2 J100.4 R206.1 R207.2 SB500.2 U200.1 U200.6 U200.7 U200.12 U201.5 | length 2
  Top Layer w0.3: U200.6@79.328,33.037 79.335,33.045 79.335,33.931 v1(79.343,33.939)
  Top Layer w0.508: v1(76.609,29.582) 76.628,29.6 U200.12@76.628,30.673
  other v1: 15.461,12.445 14.754,13.152 16.168,13.152 14.047,13.859 15.461,13.859 16.875,13.859 13.34,14.566 14.754,14.566 16.168,14.566 17.734,14.642 12.632,15.274 14.047,15.274 15.461,15.274 17.027,15.349 13.34,15.981 14.754,15.981 16.32,16.056 14.047,16.688 15.612,16.763 14.905,17.47 42.072,26.847 43.072,26.847 46.072,26.847 47.072,26.847 42.072,27.847 43.072,27.847 46.072,27.847 47.072,27.847 86.697,28.769 87.447,28.769 88.197,28.769 43.072,28.847 46.072,28.847 47.072,28.847 81.049,28.845 81.049,29.595 79.879,30.56 80.629,30.56 86.697,31.492 87.447,31.492 88.197,31.492 75.094,33.376 75.844,33.376 74.676,34.2 74.676,34.95 84.711,40.761 84.711,41.595
5V_USB: J200.1 R205.2 R206.2 | length 4.1
  Bottom Layer w0.305: R206.2@89.632,30.119 R205.2@89.632,32.076
  Bottom Layer w1.27: R206.2@89.632,30.119 J200.1@91.8,30.119
COMPASS_INTA: U500.43 U501.5 | length 41.9
  Top Layer w0.254: U501.5@50.334,40.724 51.885,40.724 53.505,39.104 53.505,9.873 55.367,8.011 55.367,6.508 56.335,5.539 57.997,5.539 U500.43@59.182,4.353
COMPASS_INTB: U500.40 U501.6 | length 35.7
  Top Layer w0.254: U501.6@50.334,40.224 50.339,40.229 51.618,40.229 52.968,38.878 52.968,8.027 U500.40@54.102,6.893
COMPASS_SCL: R500.1 U400.3 U401.21 U500.115 U501.12 | length 76.8
  Top Layer w0.3: U400.3@41.707,33.407 44.247,35.947 44.247,39.542 ; 46.152,43.739 46.164,43.751 47.349,43.751 ; 47.563,43.785 ccw(c47.98,42.127) 47.554,43.783 ; U501.12@48.834,40.724 47.308,40.724 45.336,42.696 ; v1(58.973,47.512) 56.859,47.512 53.668,44.321 53.668,43.839 R500.1@53.618,43.789 53.581,43.751 47.573,43.751 47.554,43.751 47.55,43.751 47.472,43.751 47.446,43.751 ; U500.115@59.182,65.314 59.182,61.719 44.247,46.784 44.247,46.231 ; 44.247,39.542 cw(c48.031,40) 44.247,40.459 ; 44.247,39.542 44.247,40.459 ; 44.247,40.459 cw(c48.031,40) 45.336,42.696 ; 44.247,40.459 cw(c45.91,40.047) 46.322,41.71 cw(c47.98,42.127) 47.446,43.751 ; 44.247,40.459 44.247,43.785 ; 44.247,43.785 44.247,46.231 ; 44.247,43.785 45.336,42.696 ; 44.247,46.231 ccw(c47.133,46.671) 47.472,43.771 ; 45.336,42.696 cw(c48.031,40) 47.349,43.751 ; 47.349,43.751 cw(c48.031,40) 47.472,43.771 ; 47.349,43.751 47.446,43.751 ; 47.446,43.751 cw(c47.98,42.127) 47.55,43.782 ; 47.472,43.771 cw(c48.031,40) 47.554,43.783 ; 47.472,43.771 ccw(c47.133,46.671) 47.55,43.782 ; 47.55,43.782 cw(c47.98,42.127) 47.554,43.783 ; 47.55,43.782 ccw(c47.133,46.671) 47.573,43.785 ccw(c48.031,40) 47.554,43.783
  Bottom Layer w0.254: U401.21@57.821,47.35 57.915,47.444 58.905,47.444 v1(58.973,47.512)
COMPASS_SDA: R501.1 U400.5 U401.22 U500.113 U501.2 | length 66.4
  Top Layer w0.254: R501.1@52.007,44.388 52.076,44.457 53.043,44.457 56.837,48.251 v1(60.155,48.251)
  Top Layer w0.3: U400.5@39.167,33.407 41.944,36.185 v3(41.944,47.35) 56.642,62.048 U500.113@56.642,65.314 ; v1(48.491,42.272) 49.334,41.429 U501.2@49.334,41.224
  Top Layer w0.381: v1(47.563,44.399) 47.573,44.39 R501.1@52.007,44.388 R501.1@52.007,44.388
  Bottom Layer w0.254: U401.22@57.821,48.25 v1@60.155,48.251
  Bottom Layer w0.3: v3(41.944,47.35) 44.895,44.399 v1(47.563,44.399) 47.563,43.199 v1(48.491,42.272)
GND: C201.1 C202.1 C203.1 C205.1 C206.2 C400.2 C401.2 C402.1 C403.1 C404.1 C405.1 C406.2 C407.2 C408.1 C409.1 C500.2 C501.2 C502.2 C503.2 C504.2 C505.2 C506.2 C507.2 C508.2 C509.2 C510.2 C511.2 J101.0 J200.4 J200.Shell MP100.1 MP101.1 MP102.1 MP103.1 Q100.4 R100.1 R101.1 R201.2 R203.1 R204.1 U200.3 U200.9 U200.13 U201.2 U400.1 U400.18 U401.1 U401.6 U401.8 U401.9 U401.10 U401.15 U401.18 U401.20 U401.25 U401.27 U401.30 U401.33 U401.34 U401.35 U401.36 U401.37 U401.38 U401.39 U401.40 U401.41 U401.42 U401.43 U401.44 U401.45 U401.46 U401.47 U401.48 U401.49 U401.50 U401.51 U401.52 U401.53 U401.54 U401.55 U401.56 U401.57 U401.58 U401.59 U401.60 U401.61 U401.62 U401.63 U401.64 U401.65 U401.66 U401.67 U401.68 U500.8 U500.19 U500.20 U500.22 U500.49 U500.60 U500.81 U500.92 U500.111 U500.126 U500.135 U501.1 U501.9 Y400.2 | length 1.7
  Top Layer w0.381: v1(49.327,39.014) 49.334,39.022 U501.9@49.334,39.724
  Bottom Layer w0.381: v1(49.327,39.014) 49.674,39.362 49.674,39.614 49.784,39.724 C500.2@49.834,39.724
  other v1: 79.297,27.023 76.544,27.649 79.287,28.02 76.544,28.649 79.287,29.02 77.511,30.892 78.511,30.892 77.5,31.889 78.5,31.889 68.188,32.545 69.213,32.538 70.188,32.538 71.188,32.538 72.188,32.538 77.5,32.889 78.5,32.889 68.177,33.542 69.203,33.535 69.203,34.535 88.682,34.535 68.177,34.542 68.188,35.538 88.682,35.535 78.625,35.947 76.632,36.017 68.177,36.535 88.682,36.535 78.638,36.932 76.632,37.033 68.177,37.535 88.682,37.535 78.638,37.948 90.572,39.913 87.988,40.367 90.572,40.598 59.863,43.642 58.946,44.831 65.544,45.346 56.287,45.794 65.544,46.45 64.531,47.012 62.964,47.051 59.863,47.35 61.343,47.393 62.391,48.417
LED_GND: J100.3 J100.5 Q100.1 Q100.2 Q100.5 Q100.6
LEPTON.PWR: R400.1 U401.23 U500.125 | length 24.2
  Top Layer w0.305: v1(62.38,49.95) 62.38,49.983 66.937,54.54 R400.1@66.937,54.59 66.937,54.64 67.589,55.293 67.589,57.271 71.882,61.564 U500.125@71.882,65.314
  Bottom Layer w0.305: U401.23@57.821,49.15 61.662,49.15 62.38,49.868 v1(62.38,49.95)
LEPTON.RESET: C408.2 R401.1 U401.24 U500.123 | length 22.9
  Top Layer w0.305: v1(60.528,49.784) 65.524,54.78 C408.2@65.524,56.202 R401.1@66.937,56.202 67.065,56.331 67.065,63.037 U500.123@69.342,65.314
  Bottom Layer w0.305: U401.24@57.821,50.05 57.991,50.05 58.088,49.953 58.088,49.937 58.267,49.759 60.503,49.759 v1(60.528,49.784)
LEPTON.SPI_CLK: U401.13 U500.46 | length 37.8
  Top Layer w0.508: U500.46@61.544,6.982 61.544,43.122 61.821,43.399 v1(61.821,43.461) ; U500.46@61.544,7.071 U500.46@61.722,6.893
  Bottom Layer w0.508: U401.13@61.681,42.59 61.772,42.682 61.772,43.412 v1(61.821,43.461)
LEPTON.SPI_CS: U401.14 U500.45 | length 40.7
  Top Layer w0.508: v1(60.786,43.509) 60.786,43.482 60.735,43.431 60.735,43.397 60.47,43.132 60.47,5.605 U500.45@61.722,4.353
  Bottom Layer w0.254: U401.14@60.781,42.59 U401.14@60.783,42.593 ; v1@60.783,43.507 v1(60.786,43.509)
  Bottom Layer w0.508: U401.14@60.783,42.593 v1@60.783,43.507
LEPTON.SPI_MISO: R402.1 U500.50 | length 35.7
  Top Layer w0.508: R402.1@62.964,40.973 62.964,35.652 62.959,35.647 62.959,10.736 U500.50@66.802,6.893
LEPTON.SPI_MOSI: U401.11 U500.62 | length 46.4
  Top Layer w0.508: v1(63.519,43.473) 63.581,43.473 64.381,42.673 64.381,22.487 77.902,8.966 79.969,8.966 U500.62@82.042,6.893
  Bottom Layer w0.508: U401.11@63.481,42.59 63.5,42.609 63.5,43.454 v1(63.519,43.473)
LEPTON.VSYNC: U401.2 U500.127 | length 20.5
  Top Layer w0.254: v1(65.476,50.205) 65.476,50.231 74.422,59.177 U500.127@74.422,65.314
  Bottom Layer w0.254: v1(65.476,50.205) 65.476,49.728 65.931,49.273 66.318,49.273 U401.2@66.441,49.15
LEPTON_CLK: U401.26 Y400.3 | length 6.8
  Bottom Layer w0.3: Y400.3@54.035,51.814 54.04,51.808 57.179,51.808 58.498,50.488 59.404,50.488 59.781,50.865 59.781,51.11 U401.26@59.881,51.21
NetC200_1: C200.1 R200.1 R201.1 U200.4 | length 5.7
  Top Layer w0.3: U200.4@79.328,32.137 80.669,32.137 R200.1@80.925,32.393 81.028,32.29 C200.1@82.683,32.29 84.69,32.29 R201.1@84.793,32.393
NetC200_2: C200.2 C201.2 L200.2 R200.2 SB200.1 TP200.1
NetC204_1: C204.1 R202.2 R203.2 U200.10 | length 6.2
  Top Layer w0.3: R203.2@70.587,31.278 70.828,31.519 R202.2@72.854,31.519 72.888,31.553 74.827,31.553 74.961,31.687 U200.10@76.628,31.687
NetC204_2: C204.2 C205.2 L201.2 R202.1 SB201.1 TP201.1
NetC402_2: C402.2 C403.2 SB400.1 U400.2 | length 6.4
  Bottom Layer w1.27: U400.2@44.333,30.954 U400.2@44.347,30.94
  Bottom Layer w1.524: U400.2@44.247,30.842 SB400.1@50.587,30.842
NetC501_1: C501.1 R502.1 | length 2.1
  Top Layer w0.3: R502.1@23.241,62.713 23.241,62.672 23.391,62.522 23.737,62.522 24.333,61.925 C501.1@24.333,61.29
NetC502_1: C502.1 R503.1 | length 1.7
  Bottom Layer w0.3: R503.1@9.119,63.373 9.225,63.266 9.886,63.266 C502.1@10.516,62.636
NetC503_1: C503.1 R504.2 | length 1.8
  Top Layer w0.3: R504.2@33.782,9.373 34.532,9.373 35.004,9.845 35.004,9.904 35.134,10.033 C503.1@35.255,10.033
NetC504_1: C504.1 R505.2 | length 1.4
  Top Layer w0.381: R505.2@9.987,9.5 C504.1@11.354,9.5
NetC505_1: C505.1 R506.1 | length 2.1
  Top Layer w0.3: R506.1@42.727,62.662 42.727,62.612 42.877,62.462 43.151,62.462 43.894,61.719 43.894,61.491 44.044,61.341 C505.1@44.094,61.341